# Altium PCB DRV8711EVM.PcbDoc
Units mil, origin at the board's own origin, x right, y up, seen from the top; angles counter-clockwise.
Board outline 3000 x 5000 mil, 2 copper layers (Top Layer, Bottom Layer); 42 components, 60 nets, 185 pads, 204 vias.
Unrouted connection lines stored in the file: 2.
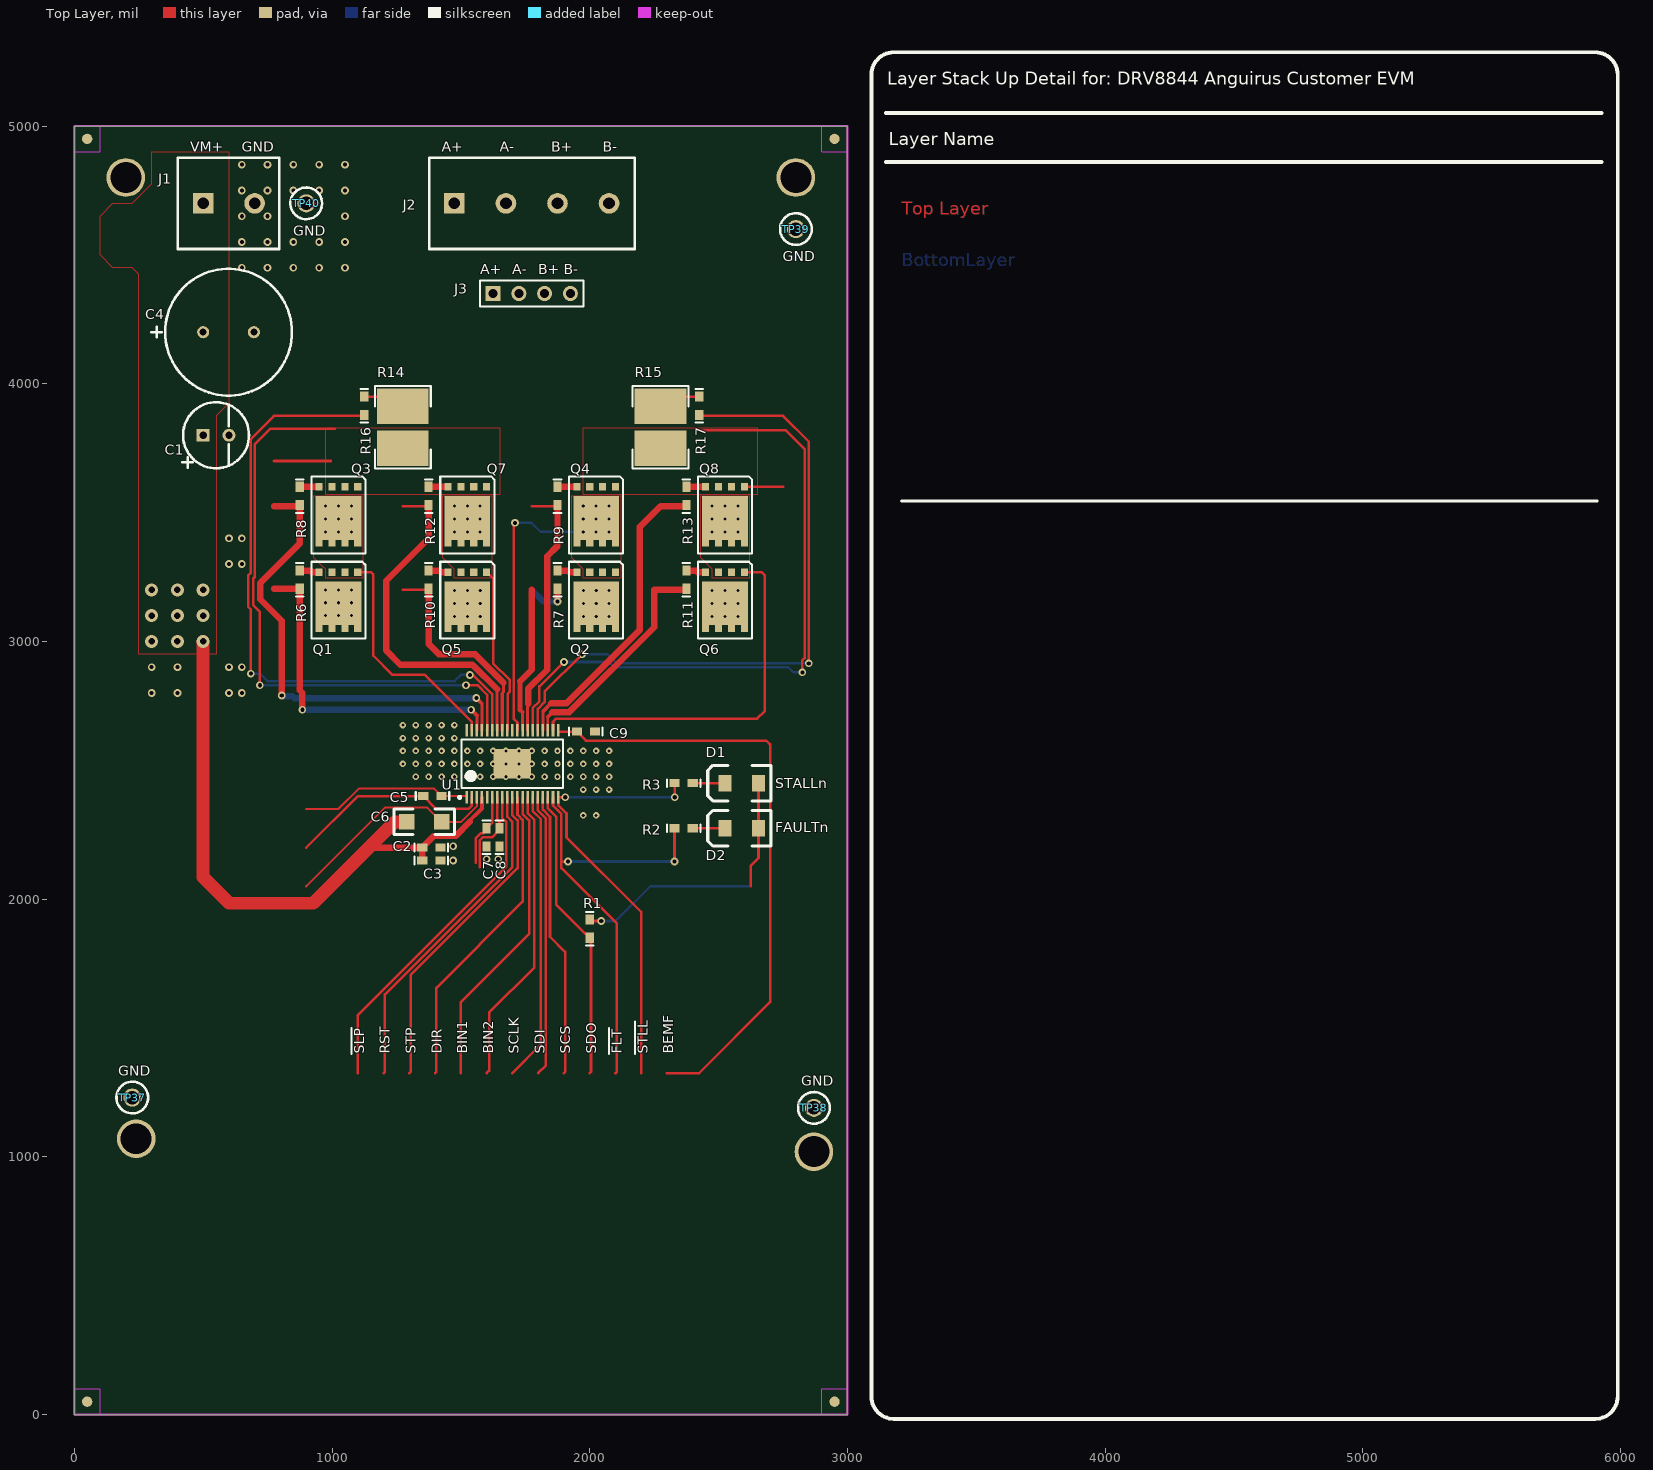
[diagram p0: Top Layer view]
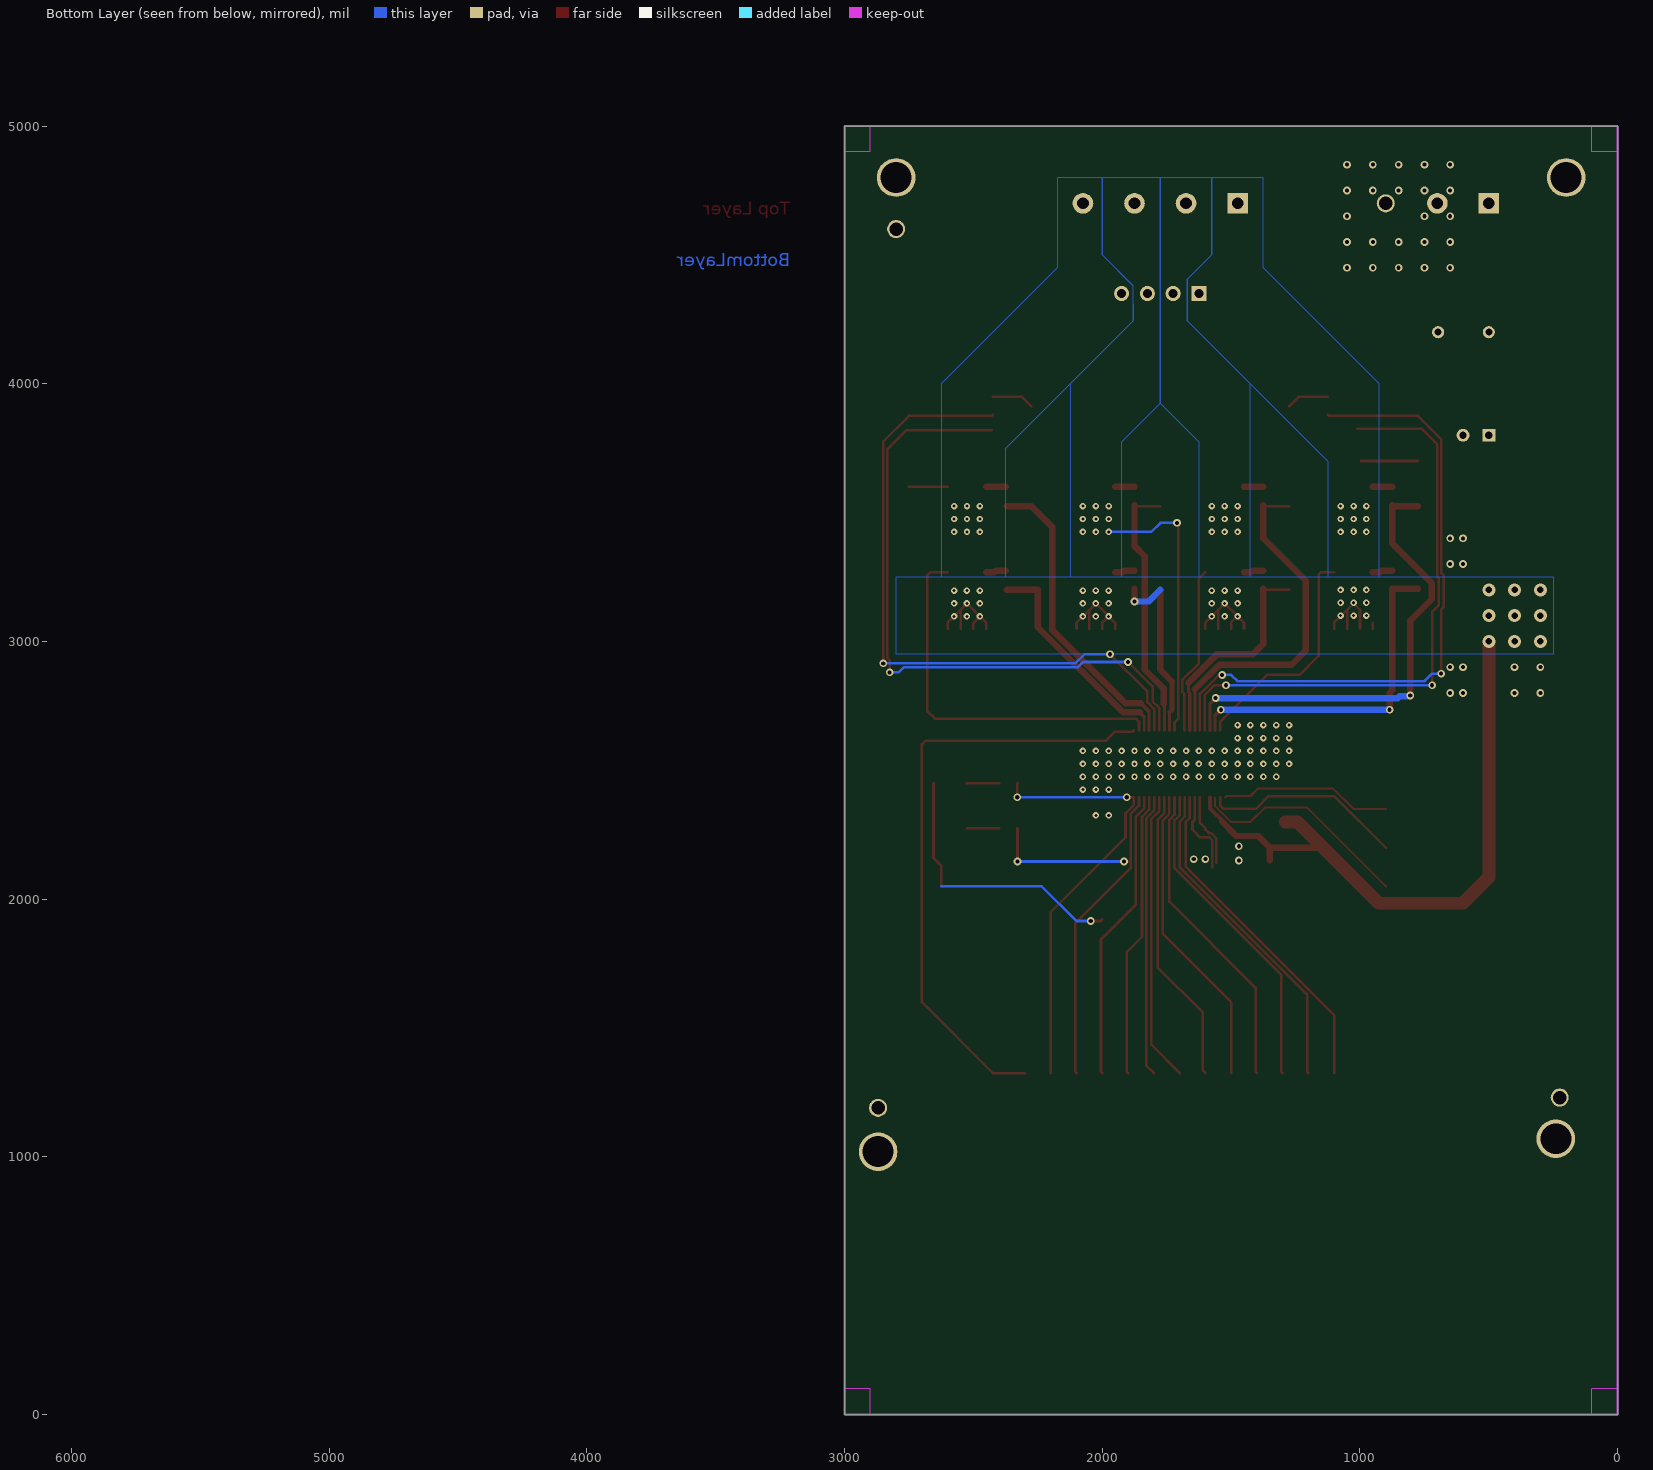
[diagram p1: Bottom Layer view, seen from below]

## Layer stack, top to bottom
Top Solder: solder mask 0.4, Solder Resist, Dk 3.5
Top Layer: signal copper 1.4
Dielectric1: core 12.6, FR-4, Dk 4.8
Bottom Layer: signal copper 1.4
Bottom Solder: solder mask 0.4, Solder Resist, Dk 3.5

## Board outline
0,0 3000,0 3000,5000 0,5000

## Design rules (kind name [scope] priority, off if disabled: settings)
Clearance [All] p1: gap=6 ignorepadtopadclearanceinfootprint=FALSE except(0: Arc-Hole Track-Hole SMDPad-Hole THPad-Hole Via-Hole Fill-Hole Poly-Hole Region-Hole Text-Hole)
ComponentClearance [All] p1: gap=-15 collisioncheckmode=3 verticalgap=5 showdistances=FALSE
FabricationTestPointUsage TestPointUsage [All] p1: valid=0 allowmultiple=FALSE
FabricationTestpoint Testpoint [All] p1: side=3 testpointundercomponent=TRUE minsize=40 maxsize=100 preferedsize=60 minholesize=0 maxholesize=40 preferedholesize=32 testpointgrid=1 allowsidetop=TRUE allowsidebottom=TRUE usegrid=TRUE gridtolerance=0.01
HoleSize [All] p1: absolutevalues=TRUE maxlimit=260 minlimit=1 maxpercent=80.000 minpercent=20.000
PlaneConnect [All] p1: planeconnectstyle=Relief reliefexpansion=20 reliefentries=4 reliefconductorwidth=15 reliefairgap=10
PolygonConnect PolygonConnect_2 [(InNet('GND')) vs IsVia or ((ObjectKind = 'Pad') And (Name = 'U1-0')  )] p1: connectstyle=Direct reliefconductorwidth=10 reliefentries=4 polygonreliefangle="90 Angle" airgapwidth=10
PolygonConnect PolygonConnect_1 [All vs IsNamedPolygon('TOP_AOUT2') Or  IsNamedPolygon('BOT_VM') Or  IsNamedPolygon('BOT_AOUT1') Or  IsNamedPolygon('BOT_BOUT2') Or  IsNamedPolygon('BOT_AOUT2') Or  IsNamedPolygon('BOT_BOUT1') Or  IsNamedPolygon('TOP_AOUT1') Or  IsNamedPolygon('TOP_BOUT2') Or  IsNamedPolygon('TOP_BOUT1') Or  IsNamedPolygon('TOP_VM') Or  IsNamedPolygon('TOP_AISENP') Or  IsNamedPolygon('TOP_BISENP')] p2: connectstyle=Direct reliefconductorwidth=10 reliefentries=4 polygonreliefangle="90 Angle" airgapwidth=10
PolygonConnect [All] p3: connectstyle=Relief reliefconductorwidth=25 reliefentries=4 polygonreliefangle="90 Angle" airgapwidth=10
RoutingVias [All] p1: holewidth=16 width=30 viastyle="Through Hole" minholewidth=12 minwidth=25 maxholewidth=50 maxwidth=50
ShortCircuit ShortCircuit_1 [All vs (ObjectKind = 'Pad') And (Name = 'Q1-5')     or (ObjectKind = 'Pad') And (Name = 'Q2-5')     or (ObjectKind = 'Pad') And (Name = 'Q3-5')     or (ObjectKind = 'Pad') And (Name = 'Q4-5')     or (ObjectKind = 'Pad') And (Name = 'Q5-5')     or (ObjectKind = 'Pad') And (Name = 'Q6-5')     or (ObjectKind = 'Pad') And (Name = 'Q7-5')     or (ObjectKind = 'Pad') And (Name = 'Q8-5')] p1: allowed=TRUE
ShortCircuit [All] p2: allowed=FALSE
SilkToSolderMaskClearance SilkscreenOverComponentPads [IsPad] p1: minsilkscreentomaskgap=10 clearancetoexposedcopper=TRUE
SolderMaskExpansion [All] p1: expansion=4
Width [All] p1: maxlimit=200 minlimit=7 preferedwidth=30 toplayer_minwidth=8 toplayer_prefwidth=10 minimp=50.000000 maximp=50.000000 favimp=50.000000
23 further rules are at their usual default settings.

## Classes and differential pairs
component class DRV8711EVM: C1 C2 C3 C4 C5 C6 C7 C8 C9 D1 D2 J1 J2 J3 R1 R2 R3 TP37 TP38 TP39 TP40 U1
component class DRV8711EVM_FET: Q1 Q2 Q3 Q4 Q5 Q6 Q7 Q8 R6 R7 R8 R9 R10 R11 R12 R13 R14 R15 R16 R17
component class DRV8711_MSP430: SHNT1
polygon class Planes: "Bottom Layer- GND" Kelvin-GND "Top Layer - GND" XV3P3
polygon class Power_CON: "Top Layer-A+" "Top Layer-A-" "Top Layer-B+" "Top Layer-B-" "Top Layer-C+" "Top Layer-C-" "Top Layer-OD_A_SW" "Top Layer-OD_B_SW" "Top Layer-OD_C_SW" "Top Layer-RSA" "Top Layer-RSB" "Top Layer-RSC" "Top Layer-VLDO_IN" "Top Layer-VLDO_OUT"

## Components (designator, comment, footprint, x,y, rotation, side; value= is the part's Value field where it differs from the comment)
C1 "" "RB .1/.250 - SML" 600,3800 r0 top value=10uF
C2 "" 0603-SMT 1350,2200 r0 top value=0.1uF
C3 "" 0603-SMT 1350,2150 r0 top value="0.01 uF"
C4 "" "RB 5.0mm/12.5mm_NoPost" 696.85,4200 r180 top value=100uF
C5 "" 0603-SMT 1425,2400 r180 top value=0.1uF
C6 "" 1206 1425,2300 r180 top value="1 uF"
C7 "" 0603-SMT 1600,2275 r270 top value=0.1uF
C8 "" 0603-SMT 1650,2275 r270 top value="1 uF"
C9 "" 0603-SMT 1950,2650 r0 top value="1000 pf"
D1 "STALL" 1206_LED 2654.92,2450 r180 top value="Red LED"
D2 "FAULTn" 1206_LED 2654.92,2275 r180 top value="Red LED"
J1 "VM" PWR_CONN2 500,4700 r0 top value=Connector
J2 "Header 4" PWR_CONN4 1475,4700 r0 top value="Terminal Block"
J3 "Stepper Out" HDR1X4 1625,4350 r0 top value="4 Pos Header"
Q1 "CSD18531Q5A" "PQFN8 FET" 1100,3268.5 r90 top value=MOSFET
Q2 "CSD18531Q5A" "PQFN8 FET" 2100,3268.5 r90 top value=MOSFET
Q3 "CSD18531Q5A" "PQFN8 FET" 1100,3600 r90 top value=MOSFET
Q4 "CSD18531Q5A" "PQFN8 FET" 2100,3600 r90 top value=MOSFET
Q5 "CSD18531Q5A" "PQFN8 FET" 1600,3268.5 r90 top value=MOSFET
Q6 "CSD18531Q5A" "PQFN8 FET" 2600,3268.5 r90 top value=MOSFET
Q7 "CSD18531Q5A" "PQFN8 FET" 1600,3600 r90 top value=MOSFET
Q8 "CSD18531Q5A" "PQFN8 FET" 2600,3600 r90 top value=MOSFET
R1 "" 0603-SMT 2000,1850 r90 top value=3.3K
R2 "330" 0603-SMT 2329.13,2275 r0 top
R3 "330" 0603-SMT 2329.13,2450 r0 top
R6 "" 0603-SMT 875,3204.13 r90 top value=0.0
R7 "" 0603-SMT 1875,3204.13 r90 top value=0.0
R8 "" 0603-SMT 875,3529.13 r90 top value=0.0
R9 "" 0603-SMT 1875,3529.13 r90 top value=0.0
R10 "" 0603-SMT 1375,3204.13 r90 top value=0.0
R11 "" 0603-SMT 2375,3204.13 r90 top value=0.0
R12 "" 0603-SMT 1375,3529.13 r90 top value=0.0
R13 "" 0603-SMT 2375,3529.13 r90 top value=0.0
R14 "0.033" 2818 1275,3911.81 r270 top
R15 "0.033" 2818 2275,3911.81 r270 top
R16 "" 0603-SMT 1125,3879.13 r90 top value=0.0
R17 "" 0603-SMT 2425,3879.13 r90 top value=0.0
TP37 "GND" "TEST POINT 0.052" 225,1230 r180 top value=BLACK
TP38 "GND" "TEST POINT 0.052" 2870,1190 r90 top value=BLACK
TP39 "GND" "TEST POINT 0.052" 2800,4600 r90 top value=BLACK
TP40 "GND" "TEST POINT 0.052" 900,4700 r0 top value=BLACK
U1 "DRV8711" "DCP38 SMT" 1522.83,2395.08 r0 top value=Driver

## Footprints (in the part's own frame and the unit in brackets; to place one, negate y for a bottom-side part, rotate by r counter-clockwise, add the part's x,y. Pads: shape width x height; smd on the part's side, far side on the other; paste and mask are expansions set on the pad)
0603-SMT [mm]
  rect 1x0.8 smd: 1(0,0) 2(1.8,0)
  silkscreen extent -0.76,-0.38 2.54,0.38
1206 [mil]
  rect 60x60 smd: 1(0,0) 2(135,0)
  silkscreen extent -50,-50 185,50
1206_LED [mm]
  rect 1.3x1.6 smd: 1(0,0) 2(3.3,0)
  silkscreen extent -1.25,-1.75 5,1.75
2818 [mm] "Chip Resistor"
  rect 3.5x5.1 smd: 1(0,0) 2(4.11,0)
  silkscreen extent -2,-2.75 6.1,2.75
"DCP38 SMT" [mm] "DCP 38 Pin  Solder"
  rect 3.7x2.9 smd: 0(4.5,3.3)
  rect 0.25x1.25 smd: 1(0,0) 2(0.5,0) 3(1,0) 4(1.5,0) 5(2,0) 6(2.5,0) 7(3,0) 8(3.5,0) 9(4,0) 10(4.5,0) 11(5,0) 12(5.5,0) 13(6,0) 14(6.5,0) 15(7,0) 16(7.5,0) 17(8,0) 18(8.5,0) 19(9,0) 20(9,6.6) 21(8.5,6.6) 22(8,6.6) 23(7.5,6.6) 24(7,6.6) 25(6.5,6.6) 26(6,6.6) 27(5.5,6.6) 28(5,6.6) 29(4.5,6.6) 30(4,6.6) 31(3.5,6.6) 32(3,6.6) 33(2.5,6.6) 34(2,6.6) 35(1.5,6.6) 36(1,6.6) 37(0.5,6.6) 38(0,6.6)
  silkscreen extent -0.82,-0.12 9.5,5.7
HDR1X4 [mm] "Connector; Header; 4 Position"
  rect 1.5x1.5 hole 0.9: 1(0,0)
  round 1.5 hole 0.9: 2(2.54,0) 3(5.08,0) 4(7.62,0)
  silkscreen extent -1.27,-1.27 8.89,1.27
"PQFN8 FET" [mm]
  rect 0.75x0.7 smd: 1(0,0) 2(0,1.27) 3(0,2.54) 4(0,3.81)
  rect 0.65x0.7 smd: 5(-5.55,0) 5(-5.55,1.27) 5(-5.55,2.54) 5(-5.55,3.81)
  rect 4.3x4.5 smd: 5(-3.075,1.9)
  silkscreen extent -6.55,-0.76 1.03,4.57
PWR_CONN2 [mil]
  rect 80x80 hole 45: 1(0,0)
  round 80 hole 45: 2(200,0)
  silkscreen extent -98,-177 295,177
PWR_CONN4 [mil]
  rect 80x80 hole 45: 1(0,0)
  round 80 hole 45: 2(200,0) 3(400,0) 4(600,0)
  silkscreen extent -98,-177 700,177
"RB 5.0mm/12.5mm_NoPost" [mm]
  round 1.2 hole 0.7: 1(5,0) 2(0,0)
  silkscreen extent -3.75,-6.25 10.1,6.25
"RB .1/.250 - SML" [mil] "Small Form Factor"
  rect 50x50 hole 28: 1(-100,0)
  round 50 hole 28: 2(0,0)
  silkscreen extent -180,-128 78,128
"TEST POINT 0.052" [mil] "Glass Beaded Test Point"
  round 70 hole 52: 1(0,0)
  silkscreen extent -62,-61 61,61

## Part data
C1: library part "Cap Pol1", "CAP ALUM 10UF 25V 20% RADIAL", DK Part Number=493-1057-ND, Manufacturer=Nichicon, MFG Part Number=UVR1E100MDD
C2 C5: library part Cap, "Capacitor", DK Part Number=445-5202-1-ND, Manufacturer=TDK, MFG Part Number=C1608X7S2A104M
  C5: Revision="July-2002: Re-released for DXP Platform."
C3: library part Cap, "Capacitor", DK Part Number=445-1304-1-ND, Manufacturer=TDK, MFG Part Number=C1608X7R2A103K
C4: library part "Cap Pol1", "CAP ALUM 100UF 100V 20% RADIAL", DK Part Number=P5313-ND, Manufacturer=Panasonic, MFG Part Number=ECA-2AM101
C6: library part Cap, "Capacitor", DK Part Number=445-1423-1-ND, Manufacturer=TDK, MFG Part Number=C3216X7R1H105K
C7: library part Cap, "Capacitor", DK Part Number=311-1343-1-ND, Manufacturer=Yageo, MFG Part Number=CC0603ZRY5V9BB104, Revision="July-2002: Re-released for DXP Platform."
C8: library part Cap, "Capacitor", DK Part Number=445-1328-1-ND, Manufacturer=TDK, MFG Part Number=C1608Y5V1A105Z
C9: library part Cap, "Capacitor", DK Part Number=311-1342-1-ND, Manufacturer=Yageo, MFG Part Number=CC0603JRNPO8BN102
D1 D2: library part LED2, "LED RED FACE UP 1206", DK Part Number=P11532CT-ND, Manufacturer=Panasonic, MFG Part Number=LNJ211R82RA
J1: library part "Header 2", "TERM BLOCK 5.08MM VERT 2POS PCB", DK Part Number=ED2580-ND, Manufacturer="On Shore Technologies", MFG Part Number=OSTTA024163
J2: "TERM BLOCK 5.08MM VERT 4POS PCB", DK Part Number=ED2582-ND, Manufacturer="On Shore Technologies", MFG Part Number=OSTTA044163
J3: library part "Header 4", "CONN HEADER .100 SNGL STR 4POS", DK Part Number=929647-09-04-ND, Manufacturer=3M, MFG Part Number=929647-09-04-I
Q1 Q2 Q3 Q4 Q5 Q6 Q7 Q8: library part IRLH5034, "MOSFET N-CH 60V 8SON", Manufacturer="Texas Instruments", DK Part Number=CSD18531Q5A, MFG Part Number=CSD18531Q5A
R1: library part Res1, "RES 3.3K OHM 1/10W 5% 0603 SMD", DK Part Number=P3.3KGCT-ND, Manufacturer=Panasonic, MFG Part Number=ERJ-3GEYJ332V, Revision="July-2002: Re-released for DXP Platform."
R2 R3: library part Res1, "Resistor", DK Part Number=311-330GRCT-ND, Manufacturer=Yageo, MFG Part Number=RC0603JR-07330RL
R6 R7 R8 R9 R10 R11 R12 R13 R16 R17: library part Res1, "RES 0.0 OHM 1/10W 0603 SMD", DK Part Number=P0.0GCT-ND, Manufacturer=Panasonic, MFG Part Number=ERJ-3GEY0R00V
R14 R15: library part Res1, "Resistor", DK Part Number=WSHA-.033CT-ND, Manufacturer=Vishay, MFG Part Number=WSH2818R0330FEA
TP37 TP38 TP39 TP40: library part "TEST POINT", "TEST POINT PC COMPACT .063\"D BLK", DK Part Number=5006K-ND, Manufacturer=Keystone, MFG Part Number=5006
U1: "Pre Driver Stepper Motor Controller", DK Part Number=N/A, Manufacturer="Texas Instruments", MFG Part Number=DRV8711DCP

## Free pads (board coordinates)
  round 40 smd: 0(50,50) 0(50,4950) 0(2950,50) 0(2950,4950)
  round 150 hole 120: 0(200,4800) 1(2800,4800) 2(2870,1020) 3(240,1070)

## Via types
v1: diameter 25, hole 12, Top Layer to Bottom Layer, 125 vias
v2: diameter 30, hole 16, Top Layer to Bottom Layer, 58 vias
v3: diameter 25, hole 12, Top Layer to Bottom Layer, tented both sides, 12 vias
v4: diameter 50, hole 25, Top Layer to Bottom Layer, 9 vias

## Nets (pads, with @x,y where several pads share a name; then routed paths per layer and width w, separated by ;. In a path a pad name is that pad's centre, name@x,y a point inside that pad or via, vN(x,y) a via of type N, cw(c..) or ccw(c..) an arc to the next point about the centre after c; other vN are vias at no path point)
A1HS: R6.1 U1.36 | length 1320.7
  Top Layer w10: R6.1 R6.1@877.2,3201.93
  Top Layer w12: U1.36 1562.2,2712.8
  Top Layer w15: v2(1540,2735) 1562.2,2712.8
  Top Layer w25: 775,3204.13 R6.1 875,2810 885,2800 v2(885,2735)
  Bottom Layer w25: v2(885,2735) v2(1540,2735)
A1LS: R8.1 U1.35 | length 1832.3
  Top Layer w10: R8.1@870.87,3525 R8.1
  Top Layer w12: 1581,2759 1581.89,2758.11 U1.35
  Top Layer w15: v2(1560,2780) 1581,2759
  Top Layer w25: 775,3525 R8.1@870.87,3525 ; v2(805,2790) 805,3080 721.5,3163.5 721.5,3226.5 875,3380 R8.1
  Bottom Layer w10: v2(805,2790) v2@807,2788
  Bottom Layer w25: v2@807,2788 845,2788 853,2780 v2(1560,2780)
A2HS: R10.1 U1.31 | length 855.2
  Top Layer w10: 1275,3200 1370.87,3200 R10.1
  Top Layer w12: U1.31 1660.63,2799.09 1665.44,2803.91 1665.44,2839.56
  Top Layer w25: R10.1 1375,2990 1415,2950 1555,2950 1665.44,2839.56
A2LS: R12.1 U1.32 | length 1386.8
  Top Layer w10: 1275,3525 1370.87,3525 R12.1
  Top Layer w12: U1.32 1640.94,2814.06
  Top Layer w25: R12.1 1375,3400 1210,3235 1210,2965 1265,2910 1545,2910 1640.94,2814.06
AISENN: R16.1 U1.33 | length 2528.5
  Top Layer w10: v2(685,2875) 684,2876 684,3125 675,3134 675,3256 684,3265 684,3784 775,3875 1120.87,3875 R16.1 ; v2(1535,2870) 1547.63,2870 1621.26,2796.37 U1.33 U1.33@1622,2655.66
  Bottom Layer w10: v2(685,2875) 720,2875 749,2846 1476,2846 1500,2870 v2(1535,2870)
AISENP: Q3.1 Q3.2 Q3.3 Q7.1 Q7.2 Q7.3 R14.2 U1.34 | length 2317.9
  Top Layer w10: v2(720,2830) 720,3115 695,3140 695,3245 700,3250 700,3765 760,3825 1010,3825 ; v2(1520,2830) 1565,2830 1602,2793 1602,2655.35 U1.34
  Bottom Layer w10: v2(720,2830) v2(1520,2830)
AOUT1: J2.1 J3.1 Q1.1 Q1.2 Q1.3 Q3.5 U1.37 | length 900.3
  Top Layer w10: Q1.1 1151.5,3268.5 1160,3260 1160,2945 1235,2870 1360,2870 1542.52,2687.48 U1.37
  other v1: 975,3425 1025,3425 1075,3425 975,3475 1025,3475 1075,3475 975,3525 1025,3525 1075,3525
AOUT2: J2.2 J3.2 Q5.1 Q5.2 Q5.3 Q7.5 U1.30 | length 654.9
  Top Layer w10: Q5.1 1625,3243.5 1625,2915 1690,2850 1690,2805 1682.44,2797.44 1682.44,2657.05 U1.30
  other v1: 1475,3425 1525,3425 1575,3425 1475,3475 1525,3475 1575,3475 1475,3525 1525,3525 1575,3525
B1HS: R7.1 U1.27 | length 746.2
  Top Layer w10: R7.1@1870.87,3200 R7.1
  Top Layer w12: U1.27 1739.37,2725.63
  Top Layer w15: 1730,2735 1739.37,2725.63
  Top Layer w20: 1730,2735 1730,2845
  Top Layer w25: 1730.62,2845.62 1775,2890 1775,3200 ; v2(1875,3155) R7.1
  Bottom Layer w10: 1775,3200 1779.13,3204.13
  Bottom Layer w25: 1775,3200 1820,3155 v2(1875,3155)
B1LS: R9.1 U1.26 | length 1019.6
  Top Layer w10: 1775,3525 1870.87,3525 R9.1
  Top Layer w12: U1.26 1759.06,2754.06
  Top Layer w25: 1760.8,2757.68 1760.8,2815.8 1835,2890 1835,3330 1875,3370 R9.1
B2HS: R11.1 U1.22 | length 880.6
  Top Layer w10: U1.22 1837.8,2707.8 ; R11.1@2370.87,3200 R11.1
  Top Layer w15: 1837.8,2707.8 1855,2725
  Top Layer w25: 1855,2725 1920,2725 2250,3055 2250,3200 R11.1@2370.87,3200
B2LS: R13.1 U1.23 | length 1196.2
  Top Layer w10: R13.1@2370.87,3525 R13.1
  Top Layer w12: U1.23 1818.3,2655.11 1818.3,2728.3 1820,2730
  Top Layer w15: 1820,2730 1850,2760
  Top Layer w25: 1850,2760 1910,2760 2195,3045 2195,3445 2275,3525 R13.1@2370.87,3525
BEMF: C9.1 U1.20 | length 2359.5
  Top Layer w10: U1.20 1882.09,2650 C9.1 1985,2615 2685,2615 2700,2600 2700,1600 2425,1325 2300,1325
BIN1: U1.12 | length 1190.5
  Top Layer w10: 1500,1325 1500,1600 1765,1865 1765,2305.25 1739.37,2330.88 U1.12
BIN2: U1.13 | length 1157.5
  Top Layer w10: 1600,1325 1610,1335 1610,1560 1785,1735 1785,2307.88 1759.06,2333.83 U1.13
BISENN: R17.1 U1.24 | length 2588.8
  Top Layer w10: U1.24 1798.43,2738.43 1825,2765 1825,2805 v2(1970,2950) ; R17.1 2429.13,3875 2750,3875 2850,3775 v2(2850,2915)
  Bottom Layer w10: v2(1970,2950) 2070,2950 2105,2915 v2(2850,2915)
BISENP: Q4.1 Q4.2 Q4.3 Q8.1 Q8.2 Q8.3 R15.2 U1.25 | length 2712.1
  Top Layer w10: U1.25 1778.74,2741.37 1805,2767.63 1805,2825 v2(1900,2920) ; 2430,3820 2760,3820 2834,3746 2834,2935.77 2824,2925.77 2824,2881 v2(2825,2880) ; Q8.1 2750,3600
  Bottom Layer w10: v2(1900,2920) 2075,2920 2096,2899 2771,2899 2790,2880 v2(2825,2880)
BOUT1: J2.3 J3.3 Q2.1 Q2.2 Q2.3 Q4.5 U1.28 | length 1091.9
  Top Layer w10: v2(1710,3460) 1706,3456 1706,2699 1719.68,2685.32 U1.28
  Bottom Layer w10: v2(1710,3460) 1775,3460 1810,3425 v1(1975,3425)
  other v1: 2025,3425 2075,3425 1975,3475 2025,3475 2075,3475 1975,3525 2025,3525 2075,3525
BOUT2: J2.4 J3.4 Q6.1 Q6.2 Q6.3 Q8.5 U1.21 | length 1483.3
  Top Layer w10: U1.21 1857.48,2687.48 1870,2700 2650,2700 2680,2730 2680,3255 2666.5,3268.5 Q6.1
  other v1: 2475,3425 2525,3425 2575,3425 2475,3475 2525,3475 2575,3475 2475,3525 2525,3525 2575,3525
CP1: C5.1 U1.1 | length 670.4
  Top Layer w8: 900,2350 1025,2350 1105,2430 1395,2430 C5.1 1517.91,2400 U1.1
CP2: C5.2 U1.2 | length 783.8
  Top Layer w10: 900,2200 1100,2400 C5.2 1404.13,2350 1530,2350 1542.52,2362.52 U1.2
DIR_AIN2: U1.11 | length 1219.3
  Top Layer w10: 1400,1325 1405,1330 1405,1655 1740,1990 1740,2307.63 1719.68,2327.94 U1.11
FAULTN: R2.1 U1.18 | length 1743.3
  Top Layer w10: U1.18 1857.48,2362.52 1890,2330 1890,2145 ; v2(1915.87,2145.87) 1915,2145 1890,2145 ; 2100,1325 2105,1330 2105,1905 1890,2120 1890,2145 ; v2(2329.13,2145.87) R2.1
  Bottom Layer w10: v2(1915.87,2145.87) v2(2329.13,2145.87)
GBEMF: 
GBIN1: 
GBIN2: 
GDIR_AIN2: 
GFAULTN: 
GND: C1.2 C2.2 C3.2 C4.2 C7.2 C8.2 C9.2 J1.2 R14.1 R15.1 R16.2 R17.2 TP37.1 TP38.1 TP39.1 TP40.1 U1.0 U1.5 U1.29 U1.38 | length 331.6
  Top Layer w10: R16.2 1236.81,3950 R14.1 ; R15.1 2313.19,3950 R17.2
  other v1: 1975,2325 2025,2325 1975,2425 2025,2425 2075,2425 1325,2475 1375,2475 1425,2475 1475,2475 1525,2475 1575,2475 1825,2475 1875,2475 1925,2475 1975,2475 2025,2475 2075,2475 1275,2525 1325,2525 1375,2525 1425,2525 1475,2525 1525,2525 1575,2525 1825,2525 1875,2525 1925,2525 1975,2525 2025,2525 2075,2525 1275,2575 1325,2575 1375,2575 1425,2575 1475,2575 1525,2575 1575,2575 1825,2575 1875,2575 1925,2575 1975,2575 2025,2575 2075,2575 1275,2625 1325,2625 1375,2625 1425,2625 1475,2625 1275,2675 1325,2675 1375,2675 1425,2675 1475,2675
  other v2: 1470,2150 1600,2155 1645,2155 1470,2205 300,2800 400,2800 600,2800 650,2800 300,2900 400,2900 600,2900 650,2900 600,3300 650,3300 600,3400 650,3400 650,4450 750,4450 850,4450 950,4450 1050,4450 650,4550 750,4550 850,4550 950,4550 1050,4550 650,4650 750,4650 1050,4650 650,4750 750,4750 850,4750 950,4750 1050,4750 650,4850 750,4850 850,4850 950,4850 1050,4850
  other v3: 1625,2475 1675,2475 1725,2475 1775,2475 1625,2525 1675,2525 1725,2525 1775,2525 1625,2575 1675,2575 1725,2575 1775,2575
GRESET: 
GSCLK: 
GSCS: 
GSDATAI: 
GSDATAO: 
GSLEEPN: 
GSTALLN: 
GSTEP_AIN1: 
NetD1_2: D1.2 R3.2 | length 125
  Top Layer w10: R3.2 D1.2
NetD2_2: D2.2 R2.2 | length 125
  Top Layer w10: R2.2 D2.2
NetQ1_4: Q1.4 R6.2 | length 77.7
  Top Layer w25: R6.2 915,3275 921.5,3268.5 Q1.4
NetQ2_4: Q2.4 R7.2 | length 77.7
  Top Layer w25: R7.2 1915,3275 1921.5,3268.5 Q2.4
NetQ3_4: Q3.4 R8.2 | length 75
  Top Layer w25: R8.2 Q3.4
NetQ4_4: Q4.4 R9.2 | length 75
  Top Layer w25: R9.2 Q4.4
NetQ5_4: Q5.4 R10.2 | length 77.7
  Top Layer w25: R10.2 1415,3275 1421.5,3268.5 Q5.4
NetQ6_4: Q6.4 R11.2 | length 77.7
  Top Layer w25: R11.2 2412.01,3275 2418.5,3268.5 Q6.4
NetQ7_4: Q7.4 R12.2 | length 75
  Top Layer w25: R12.2 Q7.4
NetQ8_4: Q8.4 R13.2 | length 75
  Top Layer w25: R13.2 Q8.4
REG3P3: D1.1 D2.1 R1.2 | length 412.4
  Top Layer w10: 2625,2050 2625,2130 2654.92,2159.92 D2.1 D1.1
RESET: U1.9 | length 1285.3
  Top Layer w10: 1200,1325 1205,1330 1205,1630 1700,2125 1700,2300 1680.31,2319.69 U1.9
SCLK: U1.14 | length 1128.6
  Top Layer w10: 1700,1325 1810,1435 1810,1700 1810,2310 1778.74,2341.26 U1.14
SCS: U1.16 | length 1108.1
  Top Layer w10: U1.16 1818.11,2347.14 1846,2319.25 1846,1854 1905,1795 1905,1330 1900,1325
SDATAO: R1.1 U1.17 | length 1141.4
  Top Layer w10: U1.17 1837.8,2352.2 1870,2320 1870,1980 R1.1 2005,1845 2005,1330 2000,1325
SDATI: U1.15 | length 1095.6
  Top Layer w10: U1.15 1798.43,2344.2 1830,2312.63 1830,1355 1800,1325
SLEEPN: U1.8 | length 1315.7
  Top Layer w10: 1100,1325 1100,1550 1676.75,2126.75 1676.75,2299.24 1660.63,2315.36 U1.8
STALLN: R3.1 U1.19 | length 1711.8
  Top Layer w10: v2(1904.92,2395.08) U1.19 1877.17,2365.46 1910,2332.63 1910,2240 2200,1950 2200,1325 ; R3.1 2329.92,2449.21 v2(2329.92,2395.08)
  Bottom Layer w10: v2(1904.92,2395.08) v2(2329.92,2395.08)
STEP_AIN1: U1.10 | length 1252.3
  Top Layer w10: 1300,1325 1305,1330 1305,1705 1720,2120 1720,2305 1700,2325 U1.10
V5: C7.1 U1.6 | length 283.9
  Top Layer w10: 1557.25,2142.25 1557.25,2235 1578.25,2256 1586,2256 1600,2270 C7.1 1621.26,2296.26 U1.6
VCP: C6.1 U1.3 | length 870.7
  Top Layer w8: 900,2050 1205,2355 1370,2355 C6.1 1501.21,2300 1562.2,2360.99 U1.3
VINT: C8.1 U1.7 | length 327.9
  Top Layer w10: 1573.25,2123.25 1573.25,2228.38 1584.88,2240 1620,2240 1650,2270 C8.1 1650,2300 1640.94,2309.06 U1.7
VM: C1.1 C2.1 C3.1 C4.1 C6.2 J1.1 Q1.5 Q2.5 Q5.5 Q6.5 U1.4 | length 3975.2
  Top Layer w10: Q1.5@950,3050 Q1.5@950,3072.24 ; Q1.5@1000,3050 1000,3122.24 1025.2,3147.44 Q1.5@1050,3122.64 ; Q1.5@1050,3050 Q1.5@1050,3122.64 ; Q1.5@1100,3050 1100,3072.64 1073.82,3098.82 Q1.5@1050,3122.64 ; Q5.5@1450,3050 1450,3072.24 v1(1475.2,3097.44) Q5.5@1476.04,3098.28 ; Q5.5@1500,3050 1500,3074.32 Q5.5@1476.04,3098.28 ; Q5.5@1550,3050 Q5.5@1550,3122.64 ; Q5.5@1600,3050 1600,3072.64 v1(1575.2,3097.44) Q5.5@1550,3122.64 ; Q2.5@1950,3050 1950,3072.24 v1(1975.2,3097.44) Q2.5@1976.03,3098.28 ; Q2.5@2000,3050 2000,3074.31 Q2.5@1976.03,3098.28 ; Q2.5@2050,3050 Q2.5@2050,3122.64 ; Q2.5@2100,3050 2100,3072.64 v1(2075.2,3097.44) Q2.5@2050,3122.64 ; Q6.5@2450,3050 2450,3072.24 Q6.5@2474.46,3096.71 ; Q6.5@2500,3050 2500,3071.17 Q6.5@2474.46,3096.71 ; Q6.5@2550,3050 Q6.5@2550,3122.64 ; Q6.5@2600,3050 2600,3072.64 v1(2575.2,3097.44) Q6.5@2550,3122.64 ; Q5.5@1476.04,3098.28 v1(1525.2,3147.44) Q5.5@1550,3122.64 ; Q2.5@1976.03,3098.28 v1(2025.2,3147.44) Q2.5@2050,3122.64 ; Q6.5@2474.46,3096.71 v1(2475.2,3097.44) v1(2525.2,3147.44) Q6.5@2550,3122.64
  Top Layer w15: 1525,2295 1581.89,2351.89 U1.4
  Top Layer w25: 1148.57,2205.23 1153.8,2200 C2.1 ; C3.1 C2.1 ; 1535,2300 1480,2245 1395,2245 C2.1
  Top Layer w50: v4(500,3000) 500,2085 601,1984 927.34,1984 1148.57,2205.23 1243.34,2300 C6.2
  other v1: 1525.2,3097.44 2025.2,3097.44 2525.2,3097.44 975,3100 1025,3100 1075,3100 1475.2,3147.44 1575.2,3147.44 1975.2,3147.44 2075.2,3147.44 2475.2,3147.44 2575.2,3147.44 975,3150 1025,3150 1075,3150 1475.2,3197.44 1525.2,3197.44 1575.2,3197.44 1975.2,3197.44 2025.2,3197.44 2075.2,3197.44 2475.2,3197.44 2525.2,3197.44 2575.2,3197.44 975,3200 1025,3200 1075,3200
  other v4: 300,3000 400,3000 300,3100 400,3100 500,3100 300,3200 400,3200 500,3200
copper on no net: | length 903.3
  Top Layer w10: 775,3700 995,3700 ; 2000,1920.87 2005.87,1915 v2(2045,1915)
  Bottom Layer w10: v2(2045,1915) 2100,1915 2235,2050 2625,2050

## Polygon pours and split planes (outlines as drawn)
GND on Top Layer "TOP_GND" (solid, shelved, pour order 1013): 0,0 3000,0 3000,5000 0,5000
VM on Top Layer "TOP_VM" (solid, shelved, pour order 1011): 600,4900 600,3925 550,3875 550,2950 250,2950 250,4425 225,4450 150,4450 100,4500 100,4650 150,4700 225,4700 300,4775 300,4900
AISENP on Top Layer "TOP_AISENP" (solid, shelved, pour order 1000): 975,3570 975,3830 1650,3830 1650,3570 975,3570
BISENP on Top Layer "TOP_BISENP" (solid, shelved, pour order 1001): 1975,3570 1975,3830 2650,3830 2650,3570 1975,3570
AOUT1 on Top Layer "TOP_AOUT1" (solid, shelved, pour order 1002): 975,3245 975,3280 965,3290 930,3325 930,3375 930,3565 1120,3565 1120,3245 975,3245
AOUT2 on Top Layer "TOP_AOUT2" (solid, shelved, pour order 1003): 1475,3245 1475,3280 1465,3290 1430,3325 1430,3375 1430,3565 1620,3565 1620,3245 1475,3245
BOUT1 on Top Layer "TOP_BOUT1" (solid, shelved, pour order 1004): 1975,3245 1975,3280 1965,3290 1930,3325 1930,3375 1930,3565 2120,3565 2120,3245 1975,3245
BOUT2 on Top Layer "TOP_BOUT2" (solid, shelved, pour order 1005): 2475,3245 2475,3280 2465,3290 2430,3325 2430,3375 2430,3565 2620,3565 2620,3245 2475,3245
GND on Bottom Layer "BOT_GND" (solid, shelved, pour order 1012): 0,0 3000,0 3000,5000 0,5000 0,0
VM on Bottom Layer "BOT_VM" (solid, shelved, pour order 1010): 550,2950 2800,2950 2800,3250 250,3250 250,2950 550,2950
BOUT2 on Bottom Layer "BOT_BOUT2" (solid, shelved, pour order 1009): 2000,4800 2175,4800 2175,4450 2625,4000 2625,3250 2375,3250 2375,3750 1880,4245 1880,4380 2000,4500
BOUT1 on Bottom Layer "BOT_BOUT1" (solid, shelved, pour order 1008): 1925,3250 1925,3775 1775,3925 1775,4800 2000,4800 2000,4500 1881.03,4381.03 1880,4245 2125,4000 2125,3250
AOUT2 on Bottom Layer "BOT_AOUT2" (solid, shelved, pour order 1007): 1425,3250 1425,4000 1670,4245 1670,4405 1575,4500 1575,4800 1775,4800 1775,3925 1625,3775 1625,3250
AOUT1 on Bottom Layer "BOT_AOUT1" (solid, shelved, pour order 1006): 1575,4800 1575,4500 1670,4405 1670,4245 1125,3700 1125,3250 925,3250 925,4000 1375,4450 1375,4800

## Keep-outs
Keep-Out Layer:
  lines w3.94: 0,100 100,100 100,0 ; 0,4900 100,4900 100,5000 ; 2900,0 2900,100 3000,100 ; 2900,5000 2900,4900 3000,4900
  lines w8: 0,0 0,5000 3000,5000 3000,0 0,0

## Other copper
Top Layer:
  text "Top Layer" at 3210,4655 h50
Bottom Layer:
  text "BottomLayer" at 3210,4455 h50

## Silkscreen, mask and mechanical layers (free items; w line width, h text height)
Top Overlay:
  lines w8: 1075,1400 1075,1500 ; 2075,1400 2075,1500 ; 2175,1400 2175,1525
  lines w10: 3210,3545 5910,3545
  lines w15: 3093,69 3093,5199 cw(c3180,5199) 3180,5286 5902,5286 cw(c5902,5199) 5989,5199 5989,69 ; 3093,70 ccw(c3180,70) 3180,-17 5902,-17 ccw(c5902,70) 5989,70 ; 3150,4860 5926,4860 ; 3150,5050 5926,5050
  text "Layer Stack Up Detail for: DRV8844 Anguirus Customer EVM" at 3155,5160 h50
  text "Layer Name" at 3160,4925 h50
  text "VM+" at 450,4900 h40
  text "GND" at 650,4900 h40
  text "A+" at 1425,4900 h40
  text "A-" at 1650,4900 h40
  text "B+" at 1850,4900 h40
  text "B-" at 2050,4900 h40
  text "A+" at 1575,4425 h40
  text "A-" at 1700,4425 h40
  text "B+" at 1800,4425 h40
  text "B-" at 1900,4425 h40
  text "STALLn" at 2720,2430 h40
  text "FAULTn" at 2720,2260 h40
  text "SLP" at 1125,1400 h40 r90
  text "RST" at 1225,1400 h40 r90
  text "STP" at 1325,1400 h40 r90
  text "DIR" at 1425,1400 h40 r90
  text "BIN1" at 1525,1400 h40 r90
  text "BIN2" at 1625,1400 h40 r90
  text "SCLK" at 1725,1400 h40 r90
  text "SDI" at 1825,1400 h40 r90
  text "SCS" at 1925,1400 h40 r90
  text "SDO" at 2025,1400 h40 r90
  text "FLT" at 2125,1400 h40 r90
  text "STLL" at 2225,1400 h40 r90
  text "BEMF" at 2325,1400 h40 r90
Mechanical 1:
  the board outline again, w8
Drill Drawing:
  text "Notes:" at 3210,3355 h60
  text "1.  NUMBER OF FINISHED LAYERS:  2" at 3210,3155 h60
  text "2.  BOARD MATERIAL AND CONSTRUCTION TO BE UL" at 3210,2955 h60
  text "APPROVED AND MARKED ON THE FINISHED BOARD." at 3410,2755 h60
  text "3.  LAMINATE MATERIAL: COPPER-CLAD FR-4" at 3210,2555 h60
  text "4.  COPPER WEIGHT: 2oz FINISHED" at 3210,2355 h60
  text "5.  FINISHED THICKNESS: .062 +/- .010" at 3210,2155 h60
  text "6.  MIN PLATING THICKNESS IN THROUGH HOLES: .001\"" at 3210,1955 h60
  text "7.  ENIG Finish" at 3210,1755 h60
  text "8.  LPI SOLDERMASK BOTH SIDES USING APPROPRIATE" at 3210,1555 h60
  text "LAYER ARTWORK:  COLOR = GREEN" at 3410,1355 h60
  text "9.  LPI SILKSCREEN AS REQUIRED:  COLOR - WHITE" at 3210,1155 h60
  text "10.  VENDOR INFORMATION TO BE INCORPORATED" at 3210,955 h60
  text "ON BACK SIDE WHENEVER POSSIBLE" at 3410,755 h60
  text "11.  MINIMUM COPPER CONDUCTOR WIDTH IS: 8 MILS" at 3210,555 h60
  text "12. MINIMUM CONDUCTOR SPACING IS: 8 MILS" at 3210,355 h60
  text ".LEGEND" at 7289.91,181.32 h50
  text "Drill Drawing." at 7280.91,55.32 h50

## Dimensions
-200,0 to -100,5000 on Mechanical 1
0,5100 to 3000,5100 on Mechanical 1